# EAGLE board UAV_ARM (EAGLE 7.0.0)
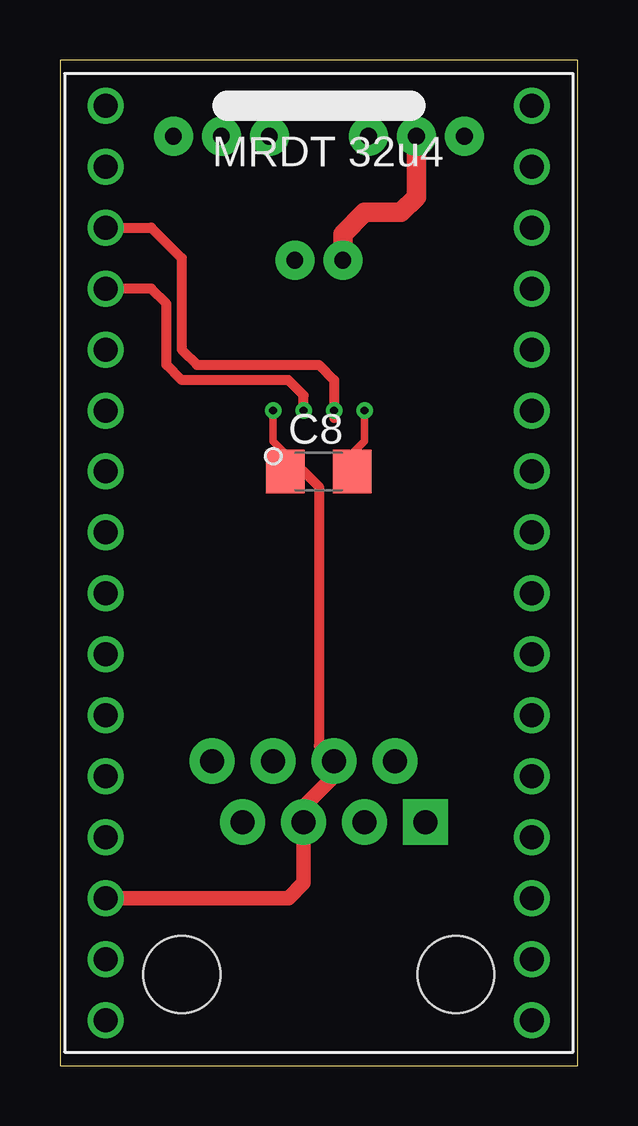
[diagram p0: board, top side]
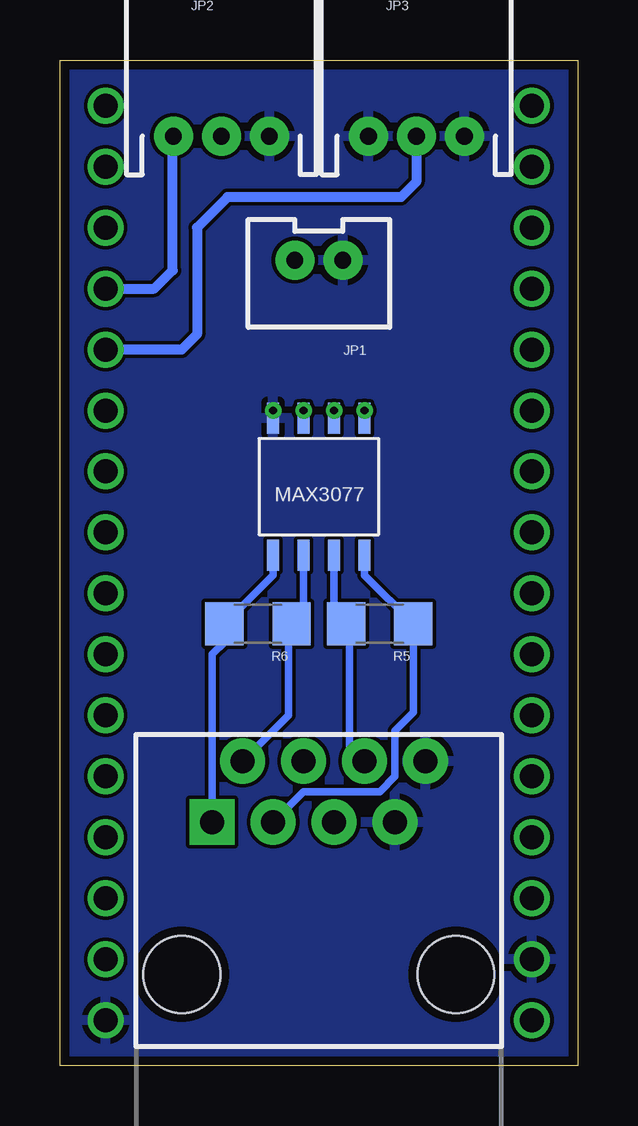
[diagram p1: board, bottom side, seen from below]

Size 21.59 x 41.91 mm. Coordinates in mm from the lower left corner, seen from the top.
Outline: 0,41.91 0,0 21.59,0 21.59,41.91 0,41.91
Copper layers (1*16): Top 0.0356mm / dielectric 1.5011mm / Bottom 0.0356mm
Design rules "OSHPark": minimum track width 6mil, minimum drill 13mil, track to track 6mil, track to pad 6mil, pad to pad 6mil, via to via 6mil, smd to smd 6mil, copper to edge 15mil, drill to drill 6mil, minimum pad ring 7mil, minimum via ring 7mil, stop-mask expansion 3mil, vias tented up to drill 0mil, thermal gap 10mil

## Footprints (pad centres in the part's own frame; a part is rotated, then mirrored left to right if it is on the bottom)
C1206 = smd 1.6 x 1.8: 1 -1.4,0; 2 1.4,0
JST-2-PTH-VERT = drill 0.7 pad 1.626: 1 -1,-0.55; 2 1,-0.55
JST-3-PTH = drill 0.7 pad 1.626: 1 -2,0; 2 0,0; 3 2,0
1206 = smd 1.6 x 1.8: 1 -1.4,0; 2 1.4,0
32U4_MCU_DIP = drill 1: 1 -8.89,19.05; 2 -8.89,16.51; 3 -8.89,13.97; 4 -8.89,11.43; 5 -8.89,8.89; 6 -8.89,6.35; 7 -8.89,3.81; 8 -8.89,1.27; 9 -8.89,-1.27; 10 -8.89,-3.81; 11 -8.89,-6.35; 12 -8.89,-8.89; 13 -8.89,-11.43; 14 -8.89,-13.97; 15 -8.89,-16.51; 16 -8.89,-19.05; 17 8.89,-19.05; 18 8.89,-16.51; 19 8.89,-13.97; 20 8.89,-11.43; 21 8.89,-8.89; 22 8.89,-6.35; 23 8.89,-3.81; 24 8.89,-1.27; 25 8.89,1.27; 26 8.89,3.81; 27 8.89,6.35; 28 8.89,8.89; 29 8.89,11.43; 30 8.89,13.97; 31 8.89,16.51; 32 8.89,19.05
MAX3070E = smd 0.49 x 1.3: A -1.905,2.857; B -0.635,2.857; DI 0.635,-2.857; GND 1.905,-2.857; RO -0.635,-2.857; VCC -1.905,-2.857; Y 1.905,2.857; Z 0.635,2.857
RJ45-8 = drill 1 pad 1.88 square: 1 -4.445,6.35 | drill 1 pad 1.88: 2 -3.175,8.89; 3 -1.905,6.35; 4 -0.635,8.89; 5 0.635,6.35; 6 1.905,8.89; 7 3.175,6.35; 8 4.445,8.89 | hole 3.2: -5.715,0; 5.715,0

## Placement (x,y rotation side)
C8  1uF  [C1206]  10.79,24.77 0 top
JP1  M02JST-PTH-VERT  [JST-2-PTH-VERT]  10.79,33.02 180 bottom
JP2  [JST-3-PTH]  14.86,38.73 0 bottom
JP3  [JST-3-PTH]  6.73,38.73 0 bottom
R5  120 Ohm  [1206]  8.26,18.42 180 bottom
R6  120 Ohm  [1206]  13.34,18.42 180 bottom
U$2  32U4_BREAKOUT  [32U4_MCU_DIP]  10.79,20.96 0 top
U$3  MAX3077  [MAX3070E]  10.79,24.13 180 bottom
U$4  RJ45-8PTH  [RJ45-8]  10.79,3.81 0 bottom

## Library data of the parts
C8 = resistor
JP1 U$4 = SparkFun-Connectors
JP2 JP3 = SparkFun-Connectors; SKU: PRT-09915
R5 R6 = SparkFun-Passives
U$2 = MRDT-2015-General
U$3 = MAX3077

## Nets
+5V: C8.1 U$2.14 U$3.VCC U$4.4 U$4.5
GND: C8.2 JP1.1 JP2.3 JP3.1 JP3.3 U$2.15 U$2.17 U$3.GND U$4.7 U$4.8
N$1: JP3.2 U$2.28
N$2: JP2.1 U$2.29
N$12: R6.2 U$3.Y U$4.1
N$18: R6.1 U$3.Z U$4.2
N$19: R5.2 U$3.B U$4.6
N$20: R5.1 U$3.A U$4.3
N$21: U$2.3 U$3.DI
RXD: U$2.4 U$3.RO
VIN: JP1.2 JP2.2

## Tracks (layer width: path | path; a pad name or v marks a point on that pad's centre or on a via)
+5V  (via drill 0.33)
  Top 0.305: C8.1 9.39,25.53 8.89,26.04 v8.89,27.31
  Top 0.406: C8.1 10.16,24.77 10.79,24.13 10.79,13.33 U$4.4
  Top 0.61: U$4.4 11.43,12.06 10.16,10.79 U$4.5 10.16,7.62 9.53,6.98 U$2.14
  Bottom 0.305: U$3.VCC v8.89,27.31
GND  (via drill 0.33)
  Top 0.305: C8.2 12.2,25.53 12.7,26.04 v12.7,27.31
  pour Bottom: -1.27,43.18 23.5,43.18 23.5,-1.27 -1.27,-1.27
N$1
  Bottom 0.406: JP3.2 6.73,36.83 7.37,36.2 14.61,36.2 15.88,34.92 15.88,30.48 16.51,29.85 U$2.28
N$2
  Bottom 0.406: U$2.29 17.65,32.38 16.89,33.15 16.89,38.7 JP2.1
N$12
  Bottom 0.305: U$3.Y 12.7,20.45 R6.2 14.73,17.65 15.24,17.15 U$4.1
N$18
  Bottom 0.305: U$3.Z 11.43,18.92 R6.1 12.06,18.29 12.06,14.61 U$4.2
N$19
  Bottom 0.305: U$3.B 10.16,18.92 R5.2 9.53,18.29 9.53,13.33 U$4.6
N$20
  Bottom 0.305: U$3.A 8.89,20.45 R5.1 6.86,14.73 7.62,13.97 7.62,12.06 8.26,11.43 11.43,11.43 U$4.3
N$21  (via drill 0.33)
  Top 0.406: U$2.3 3.81,34.92 5.08,33.66 5.08,29.85 5.71,29.21 10.79,29.21 11.43,28.58 v11.43,27.31 U$3.DI
  Bottom 0.406: U$3.DI v11.43,27.31
RXD  (via drill 0.33)
  Top 0.406: v10.16,27.31 10.16,27.94 9.53,28.58 5.08,28.58 4.45,29.21 4.45,31.75 3.81,32.38 U$2.4
  Bottom 0.305: U$3.RO 10.16,26.67
  Bottom 0.406: U$3.RO v10.16,27.31
VIN
  Top 0.813: JP1.2 11.79,34.66 12.7,35.56 14.22,35.56 14.86,36.2 JP2.2